# Altium PCB FPv1.3.5.PcbDoc (part 3 of 9)
Units mil, origin at the board's own origin, x right, y up, seen from the top; angles counter-clockwise.
Board outline 3200 x 2100 mil, 4 copper layers (Top Layer, GROUND PLANE, POWER PLANE, Bottom Layer); 98 components, 183 nets, 614 pads, 312 vias.
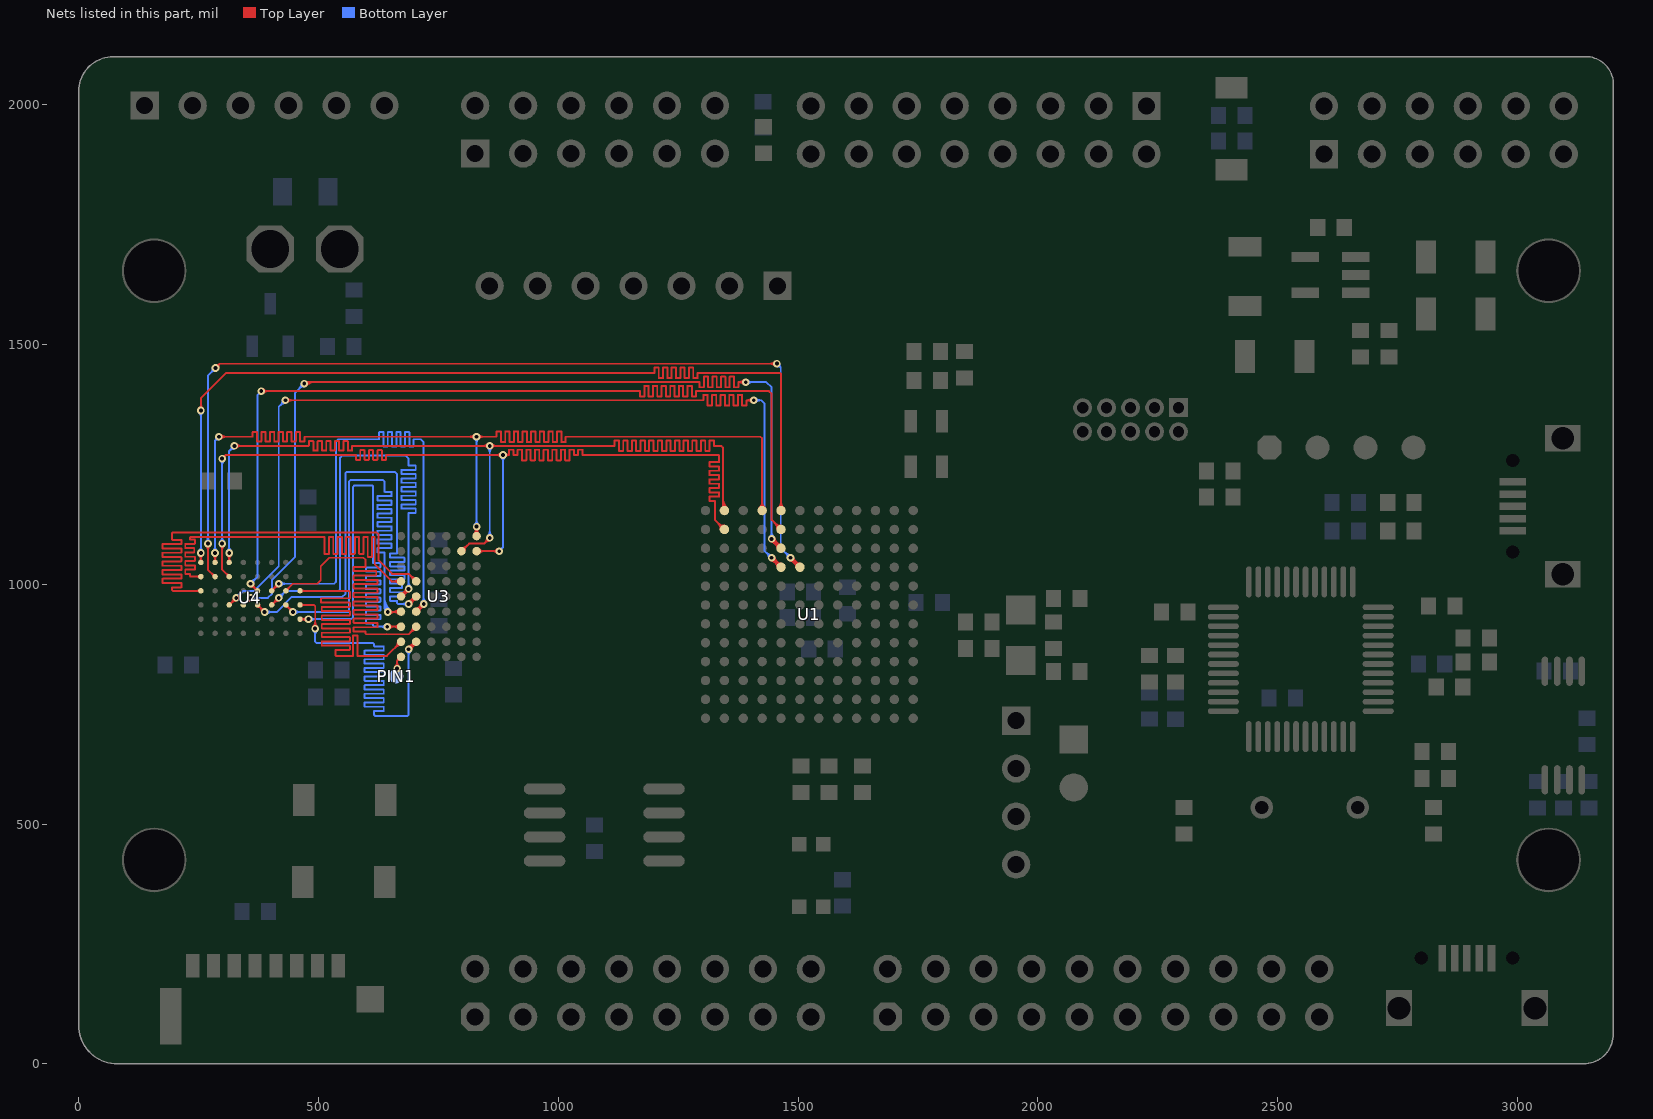
[diagram p5: the nets of this part, all layers, seen from the top]

## Via types
v1: diameter 15.87, hole 7.87, Top Layer to Bottom Layer, tented both sides, 261 vias
v2: diameter 19.8, hole 11.81, Top Layer to Bottom Layer, tented both sides, 25 vias
v3: diameter 23.62, hole 15.75, Top Layer to Bottom Layer, tented both sides, 11 vias
v4: diameter 20, hole 13, Top Layer to Bottom Layer, tented both sides, 5 vias
v5: diameter 27.68, hole 15.75, Top Layer to Bottom Layer, tented both sides, 3 vias
v6: diameter 23.74, hole 15.75, Top Layer to Bottom Layer, tented both sides, 2 vias
v7: diameter 19.8, hole 9.84, Top Layer to Bottom Layer, tented both sides, 2 vias
v8: diameter 23.62, hole 9.45, Top Layer to Bottom Layer, tented both sides, 1 vias
v9: diameter 17.24, hole 9.06, Top Layer to Bottom Layer, tented both sides, 1 vias
v10: diameter 23.74, hole 11.81, Top Layer to Bottom Layer, tented both sides, 1 vias

## Nets (pads, with @x,y where several pads share a name; then routed paths per layer and width w, separated by ;. In a path a pad name is that pad's centre, name@x,y a point inside that pad or via, vN(x,y) a via of type N, cw(c..) or ccw(c..) an arc to the next point about the centre after c; other vN are vias at no path point) (continued)
AD13: U1.B11 U3.B6 U4.F2 | length 2593.2
  Top Layer w4: v1@295.02,1080.45 cw(c284.89,1070.32) 299.21,1070.32 cw(c313.54,1070.32) v1@303.41,1080.45 ; v1(299.21,1084.65) 299.21,1030.51 U4.F2@313.98,1015.75 ; v1(299.21,1261.81) 306.76,1269.36 ; v1@300.57,1267.59 ccw(c302.08,1274.04) 306.76,1269.36 ; v1@304.99,1263.17 cw(c311.44,1264.67) 306.76,1269.36 ; U4.F2@310.27,1015.75 ccw(c301.31,1015.75) 307.65,1022.08 ccw(c313.98,1028.41) U4.F2@313.98,1019.46 ; U3.B6@829.72,1068.9 v1(876.97,1068.9) ; U3.B6@834.57,1064.05 cw(c846.28,1052.34) 846.28,1068.9 cw(c846.28,1085.45) U3.B6@834.57,1073.75 ; v1@872.77,1064.7 ccw(c862.64,1054.56) 862.64,1068.9 ccw(c862.64,1083.23) v1@872.77,1073.1 ; v1@880.64,1265.16 ccw(c870.51,1255.02) 870.51,1269.36 ccw(c870.51,1283.69) v1@880.64,1273.55 ; v1@889.41,1265.56 cw(c897.5,1258.83) 897.5,1269.36 ; v1@889.41,1273.15 ccw(c897.5,1279.88) 897.5,1269.36 ; U1.B11@1338.61,1114.17 ccw(c1319.68,1114.17) 1333.07,1127.56 ccw(c1346.46,1140.95) U1.B11@1346.46,1122.02 ; U1.B11@1346.46,1114.17 1327,1133.63 1327,1173.5 1315.53,1173.5 cw(c1315.53,1173.95) 1315.08,1173.95 1315.08,1182.05 cw(c1315.53,1182.05) 1315.53,1182.5 1334.9,1182.5 ccw(c1334.9,1182.95) 1335.35,1182.95 1335.35,1191.05 ccw(c1334.9,1191.05) 1334.9,1191.5 1315.53,1191.5 cw(c1315.53,1191.95) 1315.08,1191.95 1315.08,1200.05 cw(c1315.53,1200.05) 1315.53,1200.5 1334.9,1200.5 ccw(c1334.9,1200.95) 1335.35,1200.95 1335.35,1209.05 ccw(c1334.9,1209.05) 1334.9,1209.5 1315.53,1209.5 cw(c1315.53,1209.95) 1315.08,1209.95 1315.08,1218.05 cw(c1315.53,1218.05) 1315.53,1218.5 1334.9,1218.5 ccw(c1334.9,1218.95) 1335.35,1218.95 1335.35,1227.05 ccw(c1334.9,1227.05) 1334.9,1227.5 1315.53,1227.5 cw(c1315.53,1227.95) 1315.08,1227.95 1315.08,1236.05 cw(c1315.53,1236.05) 1315.53,1236.5 1334.9,1236.5 ccw(c1334.9,1236.95) 1335.35,1236.95 1335.35,1245.05 ccw(c1334.9,1245.05) 1334.9,1245.5 1315.53,1245.5 cw(c1315.53,1245.95) 1315.08,1245.95 1315.08,1254.05 cw(c1315.53,1254.05) 1315.53,1254.5 1334.9,1254.5 ; 306.76,1269.36 577.27,1269.36 cw(c577.27,1268.46) 578.17,1268.46 578.17,1260.26 ccw(c579.07,1260.26) 579.07,1259.36 586.27,1259.36 ccw(c586.27,1260.26) 587.17,1260.26 587.17,1278.46 cw(c588.07,1278.46) 588.07,1279.36 595.27,1279.36 cw(c595.27,1278.46) 596.17,1278.46 596.17,1260.26 ccw(c597.07,1260.26) 597.07,1259.36 604.27,1259.36 ccw(c604.27,1260.26) 605.17,1260.26 605.17,1278.46 cw(c606.07,1278.46) 606.07,1279.36 613.27,1279.36 cw(c613.27,1278.46) 614.17,1278.46 614.17,1260.26 ccw(c615.07,1260.26) 615.07,1259.36 622.27,1259.36 ccw(c622.27,1260.26) 623.17,1260.26 623.17,1278.46 cw(c624.07,1278.46) 624.07,1279.36 631.27,1279.36 cw(c631.27,1278.46) 632.17,1278.46 632.17,1260.26 ccw(c633.07,1260.26) 633.07,1259.36 640.27,1259.36 ccw(c640.27,1260.26) 641.17,1260.26 641.17,1268.46 cw(c642.07,1268.46) 642.07,1269.36 v1(884.84,1269.36) 897.5,1269.36 ; 897.5,1269.36 897.5,1279.94 cw(c897.95,1279.94) 897.95,1280.39 906.05,1280.39 cw(c906.05,1279.94) 906.5,1279.94 906.5,1269.36 915.5,1269.36 915.5,1279.94 cw(c915.95,1279.94) 915.95,1280.39 924.05,1280.39 cw(c924.05,1279.94) 924.5,1279.94 924.5,1258.78 ccw(c924.95,1258.78) 924.95,1258.33 933.05,1258.33 ccw(c933.05,1258.78) 933.5,1258.78 933.5,1279.94 cw(c933.95,1279.94) 933.95,1280.39 942.05,1280.39 cw(c942.05,1279.94) 942.5,1279.94 942.5,1258.78 ccw(c942.95,1258.78) 942.95,1258.33 951.05,1258.33 ccw(c951.05,1258.78) 951.5,1258.78 951.5,1279.94 cw(c951.95,1279.94) 951.95,1280.39 960.05,1280.39 cw(c960.05,1279.94) 960.5,1279.94 960.5,1258.78 ccw(c960.95,1258.78) 960.95,1258.33 969.05,1258.33 ccw(c969.05,1258.78) 969.5,1258.78 969.5,1279.94 cw(c969.95,1279.94) 969.95,1280.39 978.05,1280.39 cw(c978.05,1279.94) 978.5,1279.94 978.5,1258.78 ccw(c978.95,1258.78) 978.95,1258.33 987.05,1258.33 ccw(c987.05,1258.78) 987.5,1258.78 987.5,1279.94 cw(c987.95,1279.94) 987.95,1280.39 996.05,1280.39 cw(c996.05,1279.94) 996.5,1279.94 996.5,1258.78 ccw(c996.95,1258.78) 996.95,1258.33 1005.05,1258.33 ccw(c1005.05,1258.78) 1005.5,1258.78 1005.5,1279.94 cw(c1005.95,1279.94) 1005.95,1280.39 1014.05,1280.39 cw(c1014.05,1279.94) 1014.5,1279.94 1014.5,1258.78 ccw(c1014.95,1258.78) 1014.95,1258.33 1023.05,1258.33 ccw(c1023.05,1258.78) 1023.5,1258.78 1023.5,1279.94 cw(c1023.95,1279.94) 1023.95,1280.39 1032.05,1280.39 cw(c1032.05,1279.94) 1032.5,1279.94 1032.5,1269.36 1041.5,1269.36 1041.5,1279.94 cw(c1041.95,1279.94) 1041.95,1280.39 1050.05,1280.39 cw(c1050.05,1279.94) 1050.5,1279.94 1050.5,1269.36 1334.64,1269.36 1335.35,1268.65 1335.35,1254.95 ; 1334.9,1254.5 ccw(c1334.9,1254.95) 1335.35,1254.95 ; 1334.9,1254.5 1335.35,1254.95
  Bottom Layer w4: v1@295.02,1088.84 ccw(c284.89,1098.97) 299.21,1098.97 ccw(c313.54,1098.97) v1@303.41,1088.84 ; v1@295.01,1257.61 cw(c284.88,1247.48) 299.21,1247.48 cw(c313.55,1247.48) v1@303.41,1257.61 ; v1@299.21,1083.66 v1(299.21,1261.81) ; v1(876.97,1068.9) 884.84,1076.77 v1(884.84,1269.36) ; v1@880.64,1265.16 cw(c870.51,1255.02) 884.84,1255.02 cw(c899.18,1255.02) v1@889.04,1265.16
AD14: U1.B12 U3.B5 U4.F1 | length 2651.2
  Top Layer w4: v1@309.78,1060.77 cw(c299.64,1050.63) 313.98,1050.63 cw(c328.31,1050.63) v1@318.17,1060.77 ; U4.F1@311.35,1047.9 ccw(c305.02,1054.23) 313.98,1054.23 ccw(c322.93,1054.23) U4.F1@316.6,1047.9 ; U4.F1@313.98,1045.28 v1@313.98,1066.93 ; v1(324.8,1288.39) 479.33,1288.39 480.3,1289.36 480.3,1297.49 cw(c481.2,1297.49) 481.2,1298.39 488.4,1298.39 cw(c488.4,1297.49) 489.3,1297.49 489.3,1279.29 ccw(c490.2,1279.29) 490.2,1278.39 497.4,1278.39 ccw(c497.4,1279.29) 498.3,1279.29 498.3,1297.49 cw(c499.2,1297.49) 499.2,1298.39 506.4,1298.39 cw(c506.4,1297.49) 507.3,1297.49 507.3,1279.29 ccw(c508.2,1279.29) 508.2,1278.39 515.4,1278.39 ccw(c515.4,1279.29) 516.3,1279.29 516.3,1297.49 cw(c517.2,1297.49) 517.2,1298.39 524.4,1298.39 cw(c524.4,1297.49) 525.3,1297.49 525.3,1279.29 ccw(c526.2,1279.29) 526.2,1278.39 533.4,1278.39 ccw(c533.4,1279.29) 534.3,1279.29 534.3,1297.49 cw(c535.2,1297.49) 535.2,1298.39 542.4,1298.39 cw(c542.4,1297.49) 543.3,1297.49 543.3,1279.29 ccw(c544.2,1279.29) 544.2,1278.39 551.4,1278.39 ccw(c551.4,1279.29) 552.3,1279.29 552.3,1297.49 cw(c553.2,1297.49) 553.2,1298.39 560.4,1298.39 cw(c560.4,1297.49) 561.3,1297.49 561.3,1279.29 ccw(c562.2,1279.29) 562.2,1278.39 569.4,1278.39 ccw(c569.4,1279.29) 570.3,1279.29 570.3,1287.49 cw(c571.2,1287.49) 571.2,1288.39 v1(857.28,1288.39) 1117.5,1288.39 1117.5,1299.42 1126.5,1299.42 1126.5,1277.35 1135.5,1277.35 1135.5,1299.42 1144.5,1299.42 1144.5,1277.35 1153.5,1277.35 1153.5,1299.42 1162.5,1299.42 1162.5,1277.35 1171.5,1277.35 1171.5,1299.42 1180.5,1299.42 1180.5,1277.35 1189.5,1277.35 1189.5,1299.42 1198.5,1299.42 1198.5,1277.35 1207.5,1277.35 1207.5,1299.42 1216.5,1299.42 1216.5,1277.35 1225.5,1277.35 1225.5,1299.42 1234.5,1299.42 1234.5,1277.35 1243.5,1277.35 1243.5,1299.42 1252.5,1299.42 1252.5,1277.35 1261.5,1277.35 1261.5,1299.42 1270.5,1299.42 1270.5,1277.35 1279.5,1277.35 1279.5,1299.42 1288.5,1299.42 1288.5,1277.35 1297.5,1277.35 1297.5,1299.42 1306.5,1299.42 1306.5,1277.35 1315.5,1277.35 1315.5,1299.42 1324.5,1299.42 1324.5,1288.39 1339.61,1288.39 1343.35,1284.65 1343.35,1156.65 U1.B12@1346.46,1153.54 ; v1@329,1284.19 cw(c339.14,1274.05) 339.14,1288.39 cw(c339.14,1302.72) v1@329,1292.58 ; U3.B5@798.23,1068.9 813.98,1084.65 845.47,1084.65 v1(857.28,1096.46) ; U3.B5@798.23,1075.76 ccw(c798.23,1092.31) 809.94,1080.61 ccw(c821.64,1068.9) U3.B5@805.09,1068.9 ; v1@851.35,1096.46 cw(c837.03,1096.46) 847.16,1086.33 cw(c857.28,1076.2) v1@857.28,1090.52 ; v1@853.09,1284.19 ccw(c842.95,1274.05) 842.95,1288.39 ccw(c842.95,1302.72) v1@853.09,1292.58 ; v1@861.48,1284.19 cw(c871.62,1274.05) 871.62,1288.39 cw(c871.62,1302.72) v1@861.48,1292.58 ; U1.B12@1340.91,1159.09 ccw(c1335.02,1164.98) 1343.35,1164.98 ; 1343.35,1170.32 ccw(c1363.23,1170.32) U1.B12@1349.17,1156.26 ; 1343.35,1179.98 ccw(c1372.89,1179.98) U1.B12@1352,1159.09
  Bottom Layer w4: v1@309.78,1069.16 ccw(c299.64,1079.3) 313.98,1079.3 ccw(c328.31,1079.3) v1@318.17,1069.16 ; v1(313.98,1064.96) 313.98,1277.56 v1(324.8,1288.39) ; v1@318.87,1288.39 cw(c304.53,1288.39) 314.67,1278.25 cw(c324.8,1268.12) v1@324.8,1282.45 ; v1@853.09,1100.65 ccw(c842.96,1110.78) 857.28,1110.78 ccw(c871.61,1110.78) v1@861.48,1100.65 ; v1@853.09,1284.19 cw(c842.95,1274.05) 857.28,1274.05 cw(c871.62,1274.05) v1@861.48,1284.19 ; v1(857.28,1096.46) v1(857.28,1288.39)
AD15: U1.D12 U3.A6 U4.G1 | length 2623.5
  Top Layer w4: v1@280.25,1060.77 cw(c270.13,1050.64) 284.45,1050.64 cw(c298.77,1050.64) v1@288.64,1060.77 ; U4.G1@281.83,1047.9 ccw(c275.5,1054.23) 284.45,1054.23 ccw(c293.4,1054.23) U4.G1@287.07,1047.9 ; U4.G1@284.45,1045.28 v1(284.45,1064.96) ; v1(292.49,1307.41) 361.99,1307.41 ccw(c361.99,1308.31) 362.89,1308.31 362.89,1316.51 cw(c363.79,1316.51) 363.79,1317.41 370.99,1317.41 cw(c370.99,1316.51) 371.89,1316.51 371.89,1298.31 ccw(c372.79,1298.31) 372.79,1297.41 379.99,1297.41 ccw(c379.99,1298.31) 380.89,1298.31 380.89,1316.51 cw(c381.79,1316.51) 381.79,1317.41 388.99,1317.41 cw(c388.99,1316.51) 389.89,1316.51 389.89,1298.31 ccw(c390.79,1298.31) 390.79,1297.41 397.99,1297.41 ccw(c397.99,1298.31) 398.89,1298.31 398.89,1316.51 cw(c399.79,1316.51) 399.79,1317.41 406.99,1317.41 cw(c406.99,1316.51) 407.89,1316.51 407.89,1298.31 ccw(c408.79,1298.31) 408.79,1297.41 415.99,1297.41 ccw(c415.99,1298.31) 416.89,1298.31 416.89,1316.51 cw(c417.79,1316.51) 417.79,1317.41 424.99,1317.41 cw(c424.99,1316.51) 425.89,1316.51 425.89,1298.31 ccw(c426.79,1298.31) 426.79,1297.41 433.99,1297.41 ccw(c433.99,1298.31) 434.89,1298.31 434.89,1316.51 cw(c435.79,1316.51) 435.79,1317.41 442.99,1317.41 cw(c442.99,1316.51) 443.89,1316.51 443.89,1298.31 ccw(c444.79,1298.31) 444.79,1297.41 451.99,1297.41 ccw(c451.99,1298.31) 452.89,1298.31 452.89,1316.51 cw(c453.79,1316.51) 453.79,1317.41 460.99,1317.41 cw(c460.99,1316.51) 461.89,1316.51 461.89,1298.31 ccw(c462.79,1298.31) 462.79,1297.41 469.99,1297.41 ccw(c469.99,1298.31) 470.89,1298.31 470.89,1306.51 cw(c471.79,1306.51) 471.79,1307.41 v1(829.55,1307.41) 871.5,1307.41 871.5,1317.99 cw(c871.95,1317.99) 871.95,1318.44 880.05,1318.44 cw(c880.05,1317.99) 880.5,1317.99 880.5,1296.83 ccw(c880.95,1296.83) 880.95,1296.38 889.05,1296.38 ccw(c889.05,1296.83) 889.5,1296.83 889.5,1317.99 cw(c889.95,1317.99) 889.95,1318.44 898.05,1318.44 cw(c898.05,1317.99) 898.5,1317.99 898.5,1296.83 ccw(c898.95,1296.83) 898.95,1296.38 907.05,1296.38 ccw(c907.05,1296.83) 907.5,1296.83 907.5,1317.99 cw(c907.95,1317.99) 907.95,1318.44 916.05,1318.44 cw(c916.05,1317.99) 916.5,1317.99 916.5,1296.83 ccw(c916.95,1296.83) 916.95,1296.38 925.05,1296.38 ccw(c925.05,1296.83) 925.5,1296.83 925.5,1317.99 cw(c925.95,1317.99) 925.95,1318.44 934.05,1318.44 cw(c934.05,1317.99) 934.5,1317.99 934.5,1296.83 ccw(c934.95,1296.83) 934.95,1296.38 943.05,1296.38 ccw(c943.05,1296.83) 943.5,1296.83 943.5,1317.99 cw(c943.95,1317.99) 943.95,1318.44 952.05,1318.44 cw(c952.05,1317.99) 952.5,1317.99 952.5,1296.83 ccw(c952.95,1296.83) 952.95,1296.38 961.05,1296.38 ccw(c961.05,1296.83) 961.5,1296.83 961.5,1317.99 cw(c961.95,1317.99) 961.95,1318.44 970.05,1318.44 cw(c970.05,1317.99) 970.5,1317.99 970.5,1296.83 ccw(c970.95,1296.83) 970.95,1296.38 979.05,1296.38 ccw(c979.05,1296.83) 979.5,1296.83 979.5,1317.99 cw(c979.95,1317.99) 979.95,1318.44 988.05,1318.44 cw(c988.05,1317.99) 988.5,1317.99 988.5,1296.83 ccw(c988.95,1296.83) 988.95,1296.38 997.05,1296.38 ccw(c997.05,1296.83) 997.5,1296.83 997.5,1317.99 cw(c997.95,1317.99) 997.95,1318.44 1006.05,1318.44 cw(c1006.05,1317.99) 1006.5,1317.99 1006.5,1296.83 ccw(c1006.95,1296.83) 1006.95,1296.38 1015.05,1296.38 ccw(c1015.05,1296.83) 1015.5,1296.83 1015.5,1307.41 1421.59,1307.41 1425.2,1303.8 U1.D12@1425.2,1153.54 ; v1@296.69,1303.22 cw(c306.83,1293.08) 306.83,1307.41 cw(c306.83,1321.75) v1@296.69,1311.61 ; U3.A6@824.87,1105.24 ccw(c813.17,1116.95) 829.72,1116.95 ccw(c846.28,1116.95) U3.A6@834.57,1105.24 ; v1@825.36,1303.22 ccw(c815.22,1293.08) 815.22,1307.41 ccw(c815.22,1321.75) v1@825.36,1311.61 ; v1@825.53,1115.88 cw(c815.39,1105.75) 829.72,1105.75 cw(c844.06,1105.75) v1@833.92,1115.88 ; v1@826.07,1115.4 cw(c822.91,1111.35) 827.87,1110.03 cw(c834.39,1108.28) v1@831.91,1114.56 ; v1@827.54,1114.56 cw(c825.06,1108.28) 831.58,1110.03 cw(c836.54,1111.35) v1@833.38,1115.4 ; U3.A6@829.72,1100.39 v1(829.72,1120.08) ; v1@833.75,1303.22 cw(c843.89,1293.08) 843.89,1307.41 cw(c843.89,1321.75) v1@833.75,1311.61 ; U1.D12@1419.65,1159.09 ccw(c1406.26,1172.48) 1425.2,1172.48 ccw(c1444.13,1172.48) U1.D12@1430.74,1159.09
  Bottom Layer w4: v1@280.25,1069.16 ccw(c270.13,1079.28) 284.45,1079.28 ccw(c298.77,1079.28) v1@288.64,1069.16 ; v1(284.45,1064.96) 284.45,1299.37 ; v1@286.65,1306.37 cw(c278.84,1304.98) 284.45,1299.37 ; v1@291.45,1301.57 ccw(c290.05,1293.77) 284.45,1299.37 ; v1(292.49,1307.41) 284.45,1299.37 ; v1@825.36,1303.22 cw(c814.81,1292.67) 829.72,1292.67 ; v1@825.53,1124.28 ccw(c815.39,1134.41) 829.72,1134.41 ccw(c844.06,1134.41) v1@833.92,1124.28 ; v1(829.55,1307.41) 829.72,1307.24 v1(829.72,1120.08) ; 829.72,1293.49 cw(c843.48,1293.49) v1@833.75,1303.22
AD16: U1.E9 U4.F4 | length 2372.6
  Top Layer w4: U4.F4@313.98,956.69 v1(328.74,971.46) ; U4.F4@313.98,960.4 ccw(c313.98,969.35) 320.3,963.02 ; U4.F4@317.68,956.69 cw(c326.65,956.69) 320.31,963.03 ; v1@322.8,971.46 cw(c308.47,971.46) 318.6,961.32 cw(c328.74,951.19) v1@328.74,965.52 ; v1(431.1,1383.53) 1302.5,1383.53 1302.5,1394.11 cw(c1302.95,1394.11) 1302.95,1394.56 1311.05,1394.56 cw(c1311.05,1394.11) 1311.5,1394.11 1311.5,1372.95 ccw(c1311.95,1372.95) 1311.95,1372.5 1320.05,1372.5 ccw(c1320.05,1372.95) 1320.5,1372.95 1320.5,1394.11 cw(c1320.95,1394.11) 1320.95,1394.56 1329.05,1394.56 cw(c1329.05,1394.11) 1329.5,1394.11 1329.5,1372.95 ccw(c1329.95,1372.95) 1329.95,1372.5 1338.05,1372.5 ccw(c1338.05,1372.95) 1338.5,1372.95 1338.5,1394.11 cw(c1338.95,1394.11) 1338.95,1394.56 1347.05,1394.56 cw(c1347.05,1394.11) 1347.5,1394.11 1347.5,1372.95 ccw(c1347.95,1372.95) 1347.95,1372.5 1356.05,1372.5 ccw(c1356.05,1372.95) 1356.5,1372.95 1356.5,1394.11 cw(c1356.95,1394.11) 1356.95,1394.56 1365.05,1394.56 cw(c1365.05,1394.11) 1365.5,1394.11 1365.5,1372.95 ccw(c1365.95,1372.95) 1365.95,1372.5 1374.05,1372.5 ccw(c1374.05,1372.95) 1374.5,1372.95 1374.5,1394.11 cw(c1374.95,1394.11) 1374.95,1394.56 1383.05,1394.56 cw(c1383.05,1394.11) 1383.5,1394.11 1383.5,1372.95 ccw(c1383.95,1372.95) 1383.95,1372.5 1392.05,1372.5 ccw(c1392.05,1372.95) 1392.5,1372.95 1392.5,1383.53 v1(1407.48,1383.53) ; v1@435.3,1379.33 cw(c445.43,1369.21) 445.43,1383.53 cw(c445.43,1397.85) v1@435.3,1387.72 ; v1@1403.29,1379.33 ccw(c1393.16,1369.21) 1393.16,1383.53 ccw(c1393.16,1397.85) v1@1403.29,1387.72 ; v1@1443.38,1049.38 cw(c1437.85,1028.27) U1.E9@1456.74,1039.18 ; v1@1444.39,1053.25 cw(c1441.26,1041.31) 1451.95,1047.48 ; v1@1444.88,1049.19 cw(c1444.88,1034.86) 1455.01,1044.99 cw(c1465.14,1055.12) v1@1450.81,1055.12 ; v1(1444.88,1055.12) U1.E9@1464.57,1035.43 ; v1@1446.75,1055.61 ccw(c1458.69,1058.74) 1452.52,1048.05 ; v1@1446.85,1049.52 cw(c1448.23,1045.58) 1451.84,1047.67 ; v1@1450.48,1053.15 ccw(c1454.42,1051.77) 1452.33,1048.16 ; v1@1450.62,1056.62 ccw(c1471.73,1062.15) U1.E9@1460.82,1043.26 ; U1.E9@1456.72,1035.43 ccw(c1437.79,1035.43) 1451.18,1048.82 ccw(c1464.57,1062.21) U1.E9@1464.57,1043.28 ; v1@1446.42,1049.39 cw(c1448.09,1043.15) 1451.32,1048.74 ccw(c1448.09,1043.15) v1@1446.42,1049.39 ; v1@1450.61,1053.58 ccw(c1456.85,1051.91) 1451.26,1048.68 cw(c1456.85,1051.91) v1@1450.61,1053.58
  Bottom Layer w4: v1(328.74,971.46) 343.5,986.22 366.14,986.22 417.32,1037.4 417.32,1369.75 v1(431.1,1383.53) ; v1@328.74,977.39 ccw(c328.74,991.73) 338.87,981.59 ccw(c349.01,971.46) v1@334.67,971.46 ; v1@425.17,1383.53 cw(c410.85,1383.53) 420.97,1373.4 cw(c431.1,1363.27) v1@431.1,1377.6 ; v1(1407.48,1383.53) 1423.47,1383.53 1430,1377 1430,1070 v1(1444.88,1055.12) ; v1@1411.68,1379.33 cw(c1421.8,1369.21) 1421.8,1383.53 cw(c1421.8,1397.85) v1@1411.68,1387.72 ; v1@1438.95,1055.12 ccw(c1424.63,1055.12) 1434.75,1065.25 ccw(c1444.88,1075.37) v1@1444.88,1061.05
AD17: U1.E10 U4.E4 | length 2374.4
  Top Layer w4: U4.E4@343.5,956.69 v1(358.27,971.46) ; U4.E4@343.5,960.4 ccw(c343.5,969.35) 349.83,963.02 ccw(c356.17,956.69) U4.E4@347.21,956.69 ; v1@352.33,971.46 cw(c338,971.46) 348.13,961.32 cw(c358.27,951.19) v1@358.27,965.52 ; v1(470.47,1418.31) 473.75,1421.59 1294.5,1421.59 1294.5,1411.01 ccw(c1294.95,1411.01) 1294.95,1410.56 1303.05,1410.56 ccw(c1303.05,1411.01) 1303.5,1411.01 1303.5,1432.17 cw(c1303.95,1432.17) 1303.95,1432.62 1312.05,1432.62 cw(c1312.05,1432.17) 1312.5,1432.17 1312.5,1411.01 ccw(c1312.95,1411.01) 1312.95,1410.56 1321.05,1410.56 ccw(c1321.05,1411.01) 1321.5,1411.01 1321.5,1432.17 cw(c1321.95,1432.17) 1321.95,1432.62 1330.05,1432.62 cw(c1330.05,1432.17) 1330.5,1432.17 1330.5,1411.01 ccw(c1330.95,1411.01) 1330.95,1410.56 1339.05,1410.56 ccw(c1339.05,1411.01) 1339.5,1411.01 1339.5,1432.17 cw(c1339.95,1432.17) 1339.95,1432.62 1348.05,1432.62 cw(c1348.05,1432.17) 1348.5,1432.17 1348.5,1411.01 ccw(c1348.95,1411.01) 1348.95,1410.56 1357.05,1410.56 ccw(c1357.05,1411.01) 1357.5,1411.01 1357.5,1432.17 cw(c1357.95,1432.17) 1357.95,1432.62 1366.05,1432.62 cw(c1366.05,1432.17) 1366.5,1432.17 1366.5,1411.01 ccw(c1366.95,1411.01) 1366.95,1410.56 1375.05,1410.56 ccw(c1375.05,1411.01) 1375.5,1411.01 1375.5,1421.59 1390.42,1421.59 v1(1390.75,1421.26) ; v1@471.84,1416.94 cw(c483.06,1405.72) 483.06,1421.59 ; v1@474.67,1414.11 cw(c492.71,1396.07) 492.71,1421.59 ; 1375.63,1421.59 cw(c1375.63,1406.15) v1@1386.55,1417.06 ; 1377.21,1421.59 ccw(c1377.21,1434.79) v1@1386.55,1425.46 ; v1@1443.38,1088.75 cw(c1437.85,1067.64) U1.E10@1456.74,1078.55 ; v1@1444.39,1092.62 cw(c1441.26,1080.68) 1451.95,1086.85 ; v1@1444.88,1088.56 cw(c1444.88,1074.23) 1455.01,1084.36 cw(c1465.14,1094.49) v1@1450.81,1094.49 ; v1(1444.88,1094.49) U1.E10@1464.57,1074.8 ; v1@1446.75,1094.98 ccw(c1458.69,1098.11) 1452.52,1087.42 ; v1@1446.85,1088.89 cw(c1448.23,1084.95) 1451.84,1087.04 ; v1@1450.48,1092.52 ccw(c1454.42,1091.14) 1452.33,1087.53 ; v1@1450.62,1095.99 ccw(c1471.73,1101.52) U1.E10@1460.82,1082.63 ; U1.E10@1456.72,1074.8 ccw(c1437.79,1074.8) 1451.18,1088.19 ccw(c1464.57,1101.58) U1.E10@1464.57,1082.65 ; v1@1446.42,1088.76 cw(c1448.09,1082.52) 1451.32,1088.11 ccw(c1448.09,1082.52) v1@1446.42,1088.76 ; v1@1450.61,1092.95 ccw(c1456.85,1091.28) 1451.26,1088.06 cw(c1456.85,1091.28) v1@1450.61,1092.95
  Bottom Layer w4: v1(358.27,971.46) 394.69,971.46 403.54,980.31 403.54,995.05 403.39,995.21 403.39,1009.2 450.79,1056.6 450.79,1398.62 v1(470.47,1418.31) ; v1@362.47,967.26 cw(c372.6,957.12) 372.6,971.46 cw(c372.6,985.79) v1@362.47,975.65 ; v1@464.54,1418.31 cw(c450.22,1418.31) 460.34,1408.18 cw(c470.47,1398.05) v1@470.47,1412.37 ; v1(1390.75,1421.26) 1433.74,1421.26 1444.88,1410.12 v1(1444.88,1094.49) ; v1@1394.94,1417.06 cw(c1405.07,1406.94) 1405.07,1421.26 cw(c1405.07,1435.58) v1@1394.94,1425.46 ; v1@1440.69,1098.68 ccw(c1430.56,1108.81) 1444.88,1108.81 ccw(c1459.21,1108.81) v1@1449.08,1098.68
AD18: U1.E11 U4.D3 | length 2182.3
  Top Layer w4: v1@358.27,995.05 cw(c358.27,980.71) 368.4,990.85 cw(c378.54,1000.98) v1@364.2,1000.98 ; v1(358.27,1000.98) U4.D3@373.03,986.22 ; U4.D3@369.32,986.22 ccw(c360.37,986.22) 366.7,992.55 ccw(c373.03,998.88) U4.D3@373.03,989.93 ; v1(380.91,1402.56) 1170.5,1402.56 1170.5,1391.98 ccw(c1170.95,1391.98) 1170.95,1391.53 1179.05,1391.53 ccw(c1179.05,1391.98) 1179.5,1391.98 1179.5,1413.14 cw(c1179.95,1413.14) 1179.95,1413.59 1188.05,1413.59 cw(c1188.05,1413.14) 1188.5,1413.14 1188.5,1391.98 ccw(c1188.95,1391.98) 1188.95,1391.53 1197.05,1391.53 ccw(c1197.05,1391.98) 1197.5,1391.98 1197.5,1413.14 cw(c1197.95,1413.14) 1197.95,1413.59 1206.05,1413.59 cw(c1206.05,1413.14) 1206.5,1413.14 1206.5,1391.98 ccw(c1206.95,1391.98) 1206.95,1391.53 1215.05,1391.53 ccw(c1215.05,1391.98) 1215.5,1391.98 1215.5,1413.14 cw(c1215.95,1413.14) 1215.95,1413.59 1224.05,1413.59 cw(c1224.05,1413.14) 1224.5,1413.14 1224.5,1391.98 ccw(c1224.95,1391.98) 1224.95,1391.53 1233.05,1391.53 ccw(c1233.05,1391.98) 1233.5,1391.98 1233.5,1413.14 cw(c1233.95,1413.14) 1233.95,1413.59 1242.05,1413.59 cw(c1242.05,1413.14) 1242.5,1413.14 1242.5,1391.98 ccw(c1242.95,1391.98) 1242.95,1391.53 1251.05,1391.53 ccw(c1251.05,1391.98) 1251.5,1391.98 1251.5,1413.14 cw(c1251.95,1413.14) 1251.95,1413.59 1260.05,1413.59 cw(c1260.05,1413.14) 1260.5,1413.14 1260.5,1391.98 ccw(c1260.95,1391.98) 1260.95,1391.53 1269.05,1391.53 ccw(c1269.05,1391.98) 1269.5,1391.98 1269.5,1413.14 cw(c1269.95,1413.14) 1269.95,1413.59 1278.05,1413.59 cw(c1278.05,1413.14) 1278.5,1413.14 1278.5,1391.98 ccw(c1278.95,1391.98) 1278.95,1391.53 1287.05,1391.53 ccw(c1287.05,1391.98) 1287.5,1391.98 1287.5,1402.56 1439.44,1402.56 1444.88,1397.12 1444.88,1133.86 U1.E11@1464.57,1114.17 ; v1@385.1,1398.36 cw(c395.23,1388.23) 395.23,1402.56 cw(c395.23,1416.88) v1@385.1,1406.75 ; U1.E11@1456.72,1114.17 ccw(c1437.79,1114.17) 1451.18,1127.56 ccw(c1464.57,1140.95) U1.E11@1464.57,1122.02
  Bottom Layer w4: v1(358.27,1000.98) 373.03,1015.75 373.03,1394.68 v1(380.91,1402.56) ; v1@358.27,1006.92 ccw(c358.27,1021.25) 368.4,1011.12 ccw(c378.54,1000.98) v1@364.2,1000.98
AD19: U1.E12 U4.H1 | length 2209.7
  Top Layer w4: v1@250.72,1060.77 cw(c240.59,1050.63) 254.92,1050.63 cw(c269.25,1050.63) v1@259.12,1060.77 ; v1@250.73,1366.4 ccw(c239.41,1377.72) 255.41,1377.72 ; U4.H1@252.3,1047.9 ccw(c245.97,1054.23) 254.92,1054.23 ccw(c263.87,1054.23) U4.H1@257.54,1047.9 ; U4.H1@254.92,1045.28 v1(254.92,1064.96) ; v1@255.41,1362.7 255.41,1388.29 307.74,1440.62 1200.5,1440.62 1200.5,1451.2 cw(c1200.95,1451.2) 1200.95,1451.65 1209.05,1451.65 cw(c1209.05,1451.2) 1209.5,1451.2 1209.5,1430.04 ccw(c1209.95,1430.04) 1209.95,1429.59 1218.05,1429.59 ccw(c1218.05,1430.04) 1218.5,1430.04 1218.5,1451.2 cw(c1218.95,1451.2) 1218.95,1451.65 1227.05,1451.65 cw(c1227.05,1451.2) 1227.5,1451.2 1227.5,1430.04 ccw(c1227.95,1430.04) 1227.95,1429.59 1236.05,1429.59 ccw(c1236.05,1430.04) 1236.5,1430.04 1236.5,1451.2 cw(c1236.95,1451.2) 1236.95,1451.65 1245.05,1451.65 cw(c1245.05,1451.2) 1245.5,1451.2 1245.5,1430.04 ccw(c1245.95,1430.04) 1245.95,1429.59 1254.05,1429.59 ccw(c1254.05,1430.04) 1254.5,1430.04 1254.5,1451.2 cw(c1254.95,1451.2) 1254.95,1451.65 1263.05,1451.65 cw(c1263.05,1451.2) 1263.5,1451.2 1263.5,1430.04 ccw(c1263.95,1430.04) 1263.95,1429.59 1272.05,1429.59 ccw(c1272.05,1430.04) 1272.5,1430.04 1272.5,1451.2 cw(c1272.95,1451.2) 1272.95,1451.65 1281.05,1451.65 cw(c1281.05,1451.2) 1281.5,1451.2 1281.5,1430.04 ccw(c1281.95,1430.04) 1281.95,1429.59 1290.05,1429.59 ccw(c1290.05,1430.04) 1290.5,1430.04 1290.5,1440.62 1462.38,1440.62 1464.57,1438.43 U1.E12@1464.57,1153.54 ; 255.41,1375.34 ccw(c268.06,1375.34) v1@259.12,1366.4 ; U1.E12@1459.02,1159.09 ccw(c1445.63,1172.48) 1464.57,1172.48 ccw(c1483.5,1172.48) U1.E12@1470.11,1159.09
  Bottom Layer w4: v1@250.72,1069.16 ccw(c240.59,1079.3) 254.92,1079.3 ccw(c269.25,1079.3) v1@259.12,1069.16 ; v1@250.73,1358.01 cw(c240.6,1347.88) 254.92,1347.88 cw(c269.24,1347.88) v1@259.12,1358.01 ; v1(254.92,1064.96) v1(254.92,1362.2)
AD20: U1.F9 U4.G2 | length 2366.4
  Top Layer w4: v1@265.49,1080.45 cw(c255.36,1070.32) 269.68,1070.32 cw(c284.01,1070.32) v1@273.88,1080.45 ; v1(269.68,1084.65) 269.68,1030.51 U4.G2@284.45,1015.75 ; U4.G2@280.74,1015.75 ccw(c271.79,1015.75) 278.12,1022.08 ccw(c284.45,1028.41) U4.G2@284.45,1019.46 ; v1(285.43,1450.79) 294.29,1459.64 ; v1@286.02,1456.69 ccw(c287.04,1466.9) 294.29,1459.64 ; v1@291.34,1451.38 cw(c301.54,1452.39) 294.29,1459.64 ; 1440.82,1459.64 ccw(c1440.82,1475.18) v1@1451.8,1464.2 ; 1442.53,1459.64 cw(c1442.53,1446.53) v1@1451.8,1455.8 ; v1@1456,1459.64 294.29,1459.64 ; v1@1482.75,1049.38 cw(c1477.22,1028.27) U1.F9@1496.11,1039.18 ; v1@1483.76,1053.25 cw(c1480.63,1041.31) 1491.32,1047.48 ; v1@1484.25,1049.19 cw(c1484.25,1034.86) 1494.38,1044.99 cw(c1504.51,1055.12) v1@1490.18,1055.12 ; v1(1484.25,1055.12) U1.F9@1503.94,1035.43 ; v1@1486.12,1055.61 ccw(c1498.06,1058.74) 1491.89,1048.05 ; v1@1486.22,1049.52 cw(c1487.6,1045.58) 1491.21,1047.67 ; v1@1489.85,1053.15 ccw(c1493.79,1051.77) 1491.7,1048.16 ; v1@1489.99,1056.62 ccw(c1511.1,1062.15) U1.F9@1500.19,1043.26 ; U1.F9@1496.09,1035.43 ccw(c1477.16,1035.43) 1490.55,1048.82 ccw(c1503.94,1062.21) U1.F9@1503.94,1043.28 ; v1@1485.79,1049.39 cw(c1487.46,1043.15) 1490.69,1048.74 ccw(c1487.46,1043.15) v1@1485.79,1049.39 ; v1@1489.98,1053.58 ccw(c1496.22,1051.91) 1490.63,1048.68 cw(c1496.22,1051.91) v1@1489.98,1053.58
  Bottom Layer w4: v1@265.49,1088.84 ccw(c254.99,1099.34) 269.84,1099.34 ; v1(269.68,1084.65) 269.68,1083.66 269.84,1083.81 269.84,1359.12 269.68,1359.27 269.68,1435.04 v1(285.43,1450.79) ; 269.84,1098.6 ccw(c283.64,1098.6) v1@273.88,1088.84 ; v1@279.5,1450.79 cw(c265.18,1450.79) 275.3,1440.66 cw(c285.43,1430.53) v1@285.43,1444.85 ; v1(1456,1460) 1464,1452 ; v1@1457.07,1454.16 cw(c1458.47,1446.47) 1464,1452 ; v1@1461.84,1458.93 ccw(c1469.53,1457.53) 1464,1452 ; v1@1478.32,1055.12 ccw(c1464,1055.12) 1474.12,1065.25 ccw(c1484.25,1075.37) v1@1484.25,1061.05 ; v1(1484.25,1055.12) 1464,1075.37 1464,1452
ADDR0: PIN1.1 U3.J1 | length 64.1
  Top Layer w4: v1@659.8,828.2 ccw(c649.68,838.32) 664,838.32 ccw(c678.32,838.32) v1@668.2,828.2 ; v1(664,824) 664,840.18 ; U3.J1@665.65,846.54 cw(c659.42,844.76) 664,840.18 ; U3.J1@670.36,841.83 ccw(c668.58,835.6) 664,840.18 ; U3.J1@672.24,848.43 664,840.18
ADDR1: U3.H1 U4.A3 | length 1235.2
  Top Layer w4: U4.A3@461.61,986.22 562.99,986.22 565.43,983.79 565.43,971.65 cw(c564.53,971.65) 564.53,970.75 506.33,970.75 ccw(c506.33,969.85) 505.43,969.85 505.43,962.65 ccw(c506.33,962.65) 506.33,961.75 564.53,961.75 cw(c564.53,960.85) 565.43,960.85 565.43,953.65 cw(c564.53,953.65) 564.53,952.75 507.91,952.75 ccw(c507.91,951.85) 507.01,951.85 507.01,944.65 ccw(c507.91,944.65) 507.91,943.75 564.53,943.75 cw(c564.53,942.85) 565.43,942.85 565.43,935.65 cw(c564.53,935.65) 564.53,934.75 507.91,934.75 ccw(c507.91,933.85) 507.01,933.85 507.01,926.65 ccw(c507.91,926.65) 507.91,925.75 564.53,925.75 cw(c564.53,924.85) 565.43,924.85 565.43,917.65 cw(c564.53,917.65) 564.53,916.75 507.91,916.75 ccw(c507.91,915.85) 507.01,915.85 507.01,908.65 ccw(c507.91,908.65) 507.91,907.75 564.53,907.75 cw(c564.53,906.85) 565.43,906.85 565.43,899.65 cw(c564.53,899.65) 564.53,898.75 507.91,898.75 ccw(c507.91,897.85) 507.01,897.85 507.01,890.65 ccw(c507.91,890.65) 507.91,889.75 564.53,889.75 cw(c564.53,888.85) 565.43,888.85 565.43,881.65 cw(c564.53,881.65) 564.53,880.75 507.91,880.75 ccw(c507.91,879.85) 507.01,879.85 507.01,872.65 ccw(c507.91,872.65) 507.91,871.75 564.53,871.75 cw(c564.53,870.85) 565.43,870.85 565.43,863.65 cw(c564.53,863.65) 564.53,862.75 536.33,862.75 ccw(c536.33,861.85) 535.43,861.85 535.43,851.38 536.42,850.39 571.51,850.39 ccw(c571.51,851.29) 572.41,851.29 572.41,892.26 cw(c573.31,892.26) 573.31,893.16 580.51,893.16 cw(c580.51,892.26) 581.41,892.26 581.41,850.39 642.72,850.39 U3.H1@672.24,879.92 ; U4.A3@464.24,983.6 cw(c470.57,977.27) 470.57,986.22 cw(c470.57,995.17) U4.A3@464.24,988.84 ; U3.H1@665.39,879.92 cw(c648.83,879.92) 660.54,868.21 cw(c672.24,856.51) U3.H1@672.24,873.06
ADDR2: U3.H2 U4.A4 | length 1369.3
  Top Layer w4: U4.A4@461.61,956.69 490.16,956.69 493.31,953.54 v1@493.31,907.83 ; U4.A4@464.24,954.07 cw(c470.57,947.74) 470.57,956.69 cw(c470.57,965.65) U4.A4@464.24,959.32 ; v1@488.92,911.68 ccw(c478.31,922.28) 493.31,922.28 ; 493.31,921.33 ccw(c506.96,921.33) v1@497.31,911.68 ; v1@687.24,870.06 ccw(c685.63,882.79) U3.H2@696.74,876.37 ; v1(687.99,864.17) U3.H2@703.74,879.92 ; v1@687.99,870.11 ccw(c687.99,884.43) 698.12,874.3 ccw(c708.25,864.17) v1@693.93,864.17 ; v1@689.53,869.9 ccw(c691.93,878.86) 696.56,870.83 ; v1@693.72,865.71 cw(c702.68,868.11) 694.65,872.75 ; v1@693.88,863.43 cw(c706.61,861.81) U3.H2@700.19,872.93 ; U3.H2@696.88,879.92 cw(c680.32,879.92) 692.03,868.21 cw(c703.74,856.51) U3.H2@703.74,873.06
  Bottom Layer w4: v1@488.92,903.29 cw(c478.79,893.16) 493.11,893.16 cw(c507.43,893.16) v1@497.31,903.29 ; v1(493.11,907.48) 493.11,879.92 496.06,876.97 614.17,876.97 616.14,875 616.14,871.4 ccw(c617.04,871.4) 617.04,870.5 635.24,870.5 cw(c635.24,869.6) 636.14,869.6 636.14,862.4 cw(c635.24,862.4) 635.24,861.5 597.04,861.5 ccw(c597.04,860.6) 596.14,860.6 596.14,853.4 ccw(c597.04,853.4) 597.04,852.5 635.24,852.5 cw(c635.24,851.6) 636.14,851.6 636.14,844.4 cw(c635.24,844.4) 635.24,843.5 597.04,843.5 ccw(c597.04,842.6) 596.14,842.6 596.14,835.4 ccw(c597.04,835.4) 597.04,834.5 635.24,834.5 cw(c635.24,833.6) 636.14,833.6 636.14,826.4 cw(c635.24,826.4) 635.24,825.5 597.04,825.5 ccw(c597.04,824.6) 596.14,824.6 596.14,817.4 ccw(c597.04,817.4) 597.04,816.5 635.24,816.5 cw(c635.24,815.6) 636.14,815.6 636.14,808.4 cw(c635.24,808.4) 635.24,807.5 597.04,807.5 ccw(c597.04,806.6) 596.14,806.6 596.14,799.4 ccw(c597.04,799.4) 597.04,798.5 635.24,798.5 cw(c635.24,797.6) 636.14,797.6 636.14,790.4 cw(c635.24,790.4) 635.24,789.5 597.04,789.5 ccw(c597.04,788.6) 596.14,788.6 596.14,781.4 ccw(c597.04,781.4) 597.04,780.5 635.24,780.5 cw(c635.24,779.6) 636.14,779.6 636.14,772.4 cw(c635.24,772.4) 635.24,771.5 597.04,771.5 ccw(c597.04,770.6) 596.14,770.6 596.14,763.4 ccw(c597.04,763.4) 597.04,762.5 635.24,762.5 cw(c635.24,761.6) 636.14,761.6 636.14,754.4 cw(c635.24,754.4) 635.24,753.5 597.04,753.5 ccw(c597.04,752.6) 596.14,752.6 596.14,745.4 ccw(c597.04,745.4) 597.04,744.5 635.24,744.5 cw(c635.24,743.6) 636.14,743.6 636.14,736.4 cw(c635.24,736.4) 635.24,735.5 616.14,735.5 616.14,727.36 618.11,725.39 686.02,725.39 687.99,727.36 v1(687.99,864.17) ; 616.14,734.6 cw(c617.04,734.6) 617.04,735.5 ; v1@683.8,859.98 cw(c673.67,849.85) 687.99,849.85 cw(c702.32,849.85) v1@692.19,859.98
ADDR3: U3.G1 U4.A5 | length 1316
  Top Layer w4: U4.A5@461.61,927.17 v1(479.33,927.17) ; U4.A5@464.24,924.54 cw(c470.57,918.21) 470.57,927.17 cw(c470.57,936.12) U4.A5@464.24,929.79 ; v1@475.13,922.97 ccw(c465,912.83) 465,927.17 ccw(c465,941.5) v1@475.13,931.36 ; v1(643.7,911.42) U3.G1@672.24,911.42 ; v1@647.9,907.22 cw(c658.03,897.08) 658.03,911.42 cw(c658.03,925.75) v1@647.9,915.62 ; U3.G1@667.39,906.57 ccw(c655.69,894.86) 655.69,911.42 ccw(c655.69,927.97) U3.G1@667.39,916.27
  Bottom Layer w4: v1(479.33,927.17) 567.91,927.17 572.1,931.35 572.1,1203.1 575,1206 612,1206 614.14,1203.86 614.14,1044.82 ccw(c615.04,1044.82) 615.04,1043.92 628.24,1043.92 cw(c628.24,1043.02) 629.14,1043.02 629.14,1035.82 cw(c628.24,1035.82) 628.24,1034.92 600.04,1034.92 ccw(c600.04,1034.02) 599.14,1034.02 599.14,1026.82 ccw(c600.04,1026.82) 600.04,1025.92 628.24,1025.92 cw(c628.24,1025.02) 629.14,1025.02 629.14,1017.82 cw(c628.24,1017.82) 628.24,1016.92 600.04,1016.92 ccw(c600.04,1016.02) 599.14,1016.02 599.14,1008.82 ccw(c600.04,1008.82) 600.04,1007.92 628.24,1007.92 cw(c628.24,1007.02) 629.14,1007.02 629.14,999.82 cw(c628.24,999.82) 628.24,998.92 600.04,998.92 ccw(c600.04,998.02) 599.14,998.02 599.14,990.82 ccw(c600.04,990.82) 600.04,989.92 628.24,989.92 cw(c628.24,989.02) 629.14,989.02 629.14,981.82 cw(c628.24,981.82) 628.24,980.92 600.04,980.92 ccw(c600.04,980.02) 599.14,980.02 599.14,972.82 ccw(c600.04,972.82) 600.04,971.92 628.24,971.92 cw(c628.24,971.02) 629.14,971.02 629.14,963.82 cw(c628.24,963.82) 628.24,962.92 600.04,962.92 ccw(c600.04,962.02) 599.14,962.02 599.14,954.82 ccw(c600.04,954.82) 600.04,953.92 628.24,953.92 cw(c628.24,953.02) 629.14,953.02 629.14,945.82 cw(c628.24,945.82) 628.24,944.92 600.04,944.92 ccw(c600.04,944.02) 599.14,944.02 599.14,936.82 ccw(c600.04,936.82) 600.04,935.92 628.24,935.92 cw(c628.24,935.02) 629.14,935.02 629.14,927.82 cw(c628.24,927.82) 628.24,926.92 600.04,926.92 ccw(c600.04,926.02) 599.14,926.02 599.14,918.82 ccw(c600.04,918.82) 600.04,917.92 613.24,917.92 cw(c613.24,917.02) 614.14,917.02 614.14,913.42 616.14,911.42 v1(643.7,911.42) ; v1@483.53,922.97 cw(c493.66,912.83) 493.66,927.17 cw(c493.66,941.5) v1@483.53,931.36 ; v1@639.5,907.22 ccw(c629.37,897.08) 629.37,911.42 ccw(c629.37,925.75) v1@639.5,915.62
ADDR4: U3.G2 U4.B3 | length 1252.6
  Top Layer w4: U4.B3@432.09,986.22 446.85,1000.98 498.03,1000.98 504.93,1007.89 504.93,1037.41 522.64,1055.12 593.88,1055.12 598.43,1050.57 598.43,1037.05 cw(c597.53,1037.05) 597.53,1036.15 574.33,1036.15 ccw(c574.33,1035.25) 573.43,1035.25 573.43,1028.05 ccw(c574.33,1028.05) 574.33,1027.15 619.63,1027.15 cw(c619.63,1026.25) 620.53,1026.25 620.53,1019.05 cw(c619.63,1019.05) 619.63,1018.15 574.33,1018.15 ccw(c574.33,1017.25) 573.43,1017.25 573.43,1010.05 ccw(c574.33,1010.05) 574.33,1009.15 622.53,1009.15 cw(c622.53,1008.25) 623.43,1008.25 623.43,1001.05 cw(c622.53,1001.05) 622.53,1000.15 574.33,1000.15 ccw(c574.33,999.25) 573.43,999.25 573.43,992.05 ccw(c574.33,992.05) 574.33,991.15 622.53,991.15 cw(c622.53,990.25) 623.43,990.25 623.43,983.05 cw(c622.53,983.05) 622.53,982.15 574.33,982.15 ccw(c574.33,981.25) 573.43,981.25 573.43,974.05 ccw(c574.33,974.05) 574.33,973.15 622.53,973.15 cw(c622.53,972.25) 623.43,972.25 623.43,965.05 cw(c622.53,965.05) 622.53,964.15 574.33,964.15 ccw(c574.33,963.25) 573.43,963.25 573.43,956.05 ccw(c574.33,956.05) 574.33,955.15 622.53,955.15 cw(c622.53,954.25) 623.43,954.25 623.43,947.05 cw(c622.53,947.05) 622.53,946.15 574.33,946.15 ccw(c574.33,945.25) 573.43,945.25 573.43,938.05 ccw(c574.33,938.05) 574.33,937.15 622.53,937.15 cw(c622.53,936.25) 623.43,936.25 623.43,929.05 cw(c622.53,929.05) 622.53,928.15 574.33,928.15 ccw(c574.33,927.25) 573.43,927.25 573.43,920.05 ccw(c574.33,920.05) 574.33,919.15 622.53,919.15 cw(c622.53,918.25) 623.43,918.25 623.43,911.05 cw(c622.53,911.05) 622.53,910.15 574.33,910.15 ccw(c574.33,909.25) 573.43,909.25 573.43,902.05 ccw(c574.33,902.05) 574.33,901.15 597.53,901.15 cw(c597.53,900.25) 598.43,900.25 598.43,896.65 599.41,895.67 641.73,895.67 ; U4.B3@432.09,989.93 ccw(c432.09,998.88) 438.42,992.55 ccw(c444.75,986.22) U4.B3@435.8,986.22 ; 641.42,895.98 641.73,895.67 ; U3.G2@696.88,911.42 cw(c680.32,911.42) 692.03,899.71 cw(c703.74,888) U3.G2@703.74,904.56 ; U3.G2@703.74,911.42 687.99,895.67 641.73,895.67
ADDR5: U3.F1 U4.B4 | length 1379.5
  Top Layer w4: U4.B4@432.09,952.98 cw(c432.09,944.03) 438.42,950.36 cw(c444.75,956.69) U4.B4@435.8,956.69 ; U4.B4@432.09,956.69 v1(446.85,941.93) ; v1@440.91,941.93 ccw(c426.58,941.93) 436.72,952.06 ccw(c446.85,962.2) v1@446.85,947.87 ; v1@644.69,941.8 671.13,941.8 U3.F1@672.24,942.91 ; v1@648.88,937.73 cw(c658.71,927.9) 658.71,941.8 ; v1@648.88,946.13 ccw(c659.32,956.57) 659.32,941.8 ; 653.01,941.8 ccw(c653.01,962.15) U3.F1@667.39,947.76 ; 658.37,941.8 cw(c658.37,929.04) U3.F1@667.39,938.06 ; 662.66,941.8 ccw(c662.66,952.49) U3.F1@670.22,944.93
  Bottom Layer w4: v1(446.85,941.93) 562.01,941.93 564.1,944.02 564.1,1214.57 567.06,1217.52 633.86,1217.52 637.8,1213.58 637.8,1199.8 637.8,1193.41 ccw(c638.7,1193.41) 638.7,1192.51 651.9,1192.51 cw(c651.9,1191.61) 652.8,1191.61 652.8,1184.41 cw(c651.9,1184.41) 651.9,1183.51 637.8,1183.51 623.7,1183.51 ccw(c623.7,1182.61) 622.8,1182.61 622.8,1175.41 ccw(c623.7,1175.41) 623.7,1174.51 637.8,1174.51 651.9,1174.51 cw(c651.9,1173.61) 652.8,1173.61 652.8,1166.41 cw(c651.9,1166.41) 651.9,1165.51 637.8,1165.51 623.7,1165.51 ccw(c623.7,1164.61) 622.8,1164.61 622.8,1157.41 ccw(c623.7,1157.41) 623.7,1156.51 637.8,1156.51 651.9,1156.51 cw(c651.9,1155.61) 652.8,1155.61 652.8,1148.41 cw(c651.9,1148.41) 651.9,1147.51 637.8,1147.51 623.7,1147.51 ccw(c623.7,1146.61) 622.8,1146.61 622.8,1139.41 ccw(c623.7,1139.41) 623.7,1138.51 637.8,1138.51 651.9,1138.51 cw(c651.9,1137.61) 652.8,1137.61 652.8,1130.41 cw(c651.9,1130.41) 651.9,1129.51 637.8,1129.51 623.7,1129.51 ccw(c623.7,1128.61) 622.8,1128.61 622.8,1121.41 ccw(c623.7,1121.41) 623.7,1120.51 637.8,1120.51 651.9,1120.51 cw(c651.9,1119.61) 652.8,1119.61 652.8,1112.41 cw(c651.9,1112.41) 651.9,1111.51 637.8,1111.51 623.7,1111.51 ccw(c623.7,1110.61) 622.8,1110.61 622.8,1103.41 ccw(c623.7,1103.41) 623.7,1102.51 637.8,1102.51 651.9,1102.51 cw(c651.9,1101.61) 652.8,1101.61 652.8,1094.41 cw(c651.9,1094.41) 651.9,1093.51 637.8,1093.51 623.7,1093.51 ccw(c623.7,1092.61) 622.8,1092.61 622.8,1085.41 ccw(c623.7,1085.41) 623.7,1084.51 637.8,1084.51 651.9,1084.51 cw(c651.9,1083.61) 652.8,1083.61 652.8,1076.41 cw(c651.9,1076.41) 651.9,1075.51 637.8,1075.51 623.7,1075.51 ccw(c623.7,1074.61) 622.8,1074.61 622.8,1067.41 ccw(c623.7,1067.41) 623.7,1066.51 636.9,1066.51 cw(c636.9,1065.61) 637.8,1065.61 637.8,1062.01 637.8,948.82 v1(644.69,941.93) ; v1@451.05,937.73 cw(c461.18,927.6) 461.18,941.93 cw(c461.18,956.26) v1@451.05,946.13 ; 637.8,953.58 ccw(c656.34,953.58) v1@643.23,940.47 ; 637.8,963.24 ccw(c665.99,963.24) v1@646.05,943.3 ; 637.8,972.9 ccw(c675.65,972.9) v1@648.88,946.13
ADDR6: U3.F2 U4.C3 | length 1383.1
  Top Layer w4: U4.C3@402.56,986.22 v1(417.32,1000.99) ; U4.C3@402.56,989.93 ccw(c402.56,998.86) 408.88,992.55 ccw(c415.24,986.22) U4.C3@406.27,986.22 ; v1@411.39,1000.99 cw(c397.06,1000.99) 407.19,990.86 cw(c417.32,980.73) v1@417.32,995.06 ; U3.F2@703.74,942.91 v1(719.49,958.67) ; U3.F2@703.74,949.77 ccw(c703.74,966.32) v1@715.44,954.62 ; U3.F2@707.28,949.91 ccw(c700.86,961.03) v1@713.6,959.41 ; U3.F2@710.6,942.91 cw(c727.17,942.91) v1@715.45,954.63 ; U3.F2@710.74,946.46 cw(c721.85,940.05) v1@720.23,952.78 ; 710.92,952.01 cw(c715.55,943.99) v1@717.95,952.93 ; 712.83,950.09 ccw(c704.79,954.73) v1@713.76,957.13 ; v1@713.55,958.67 cw(c699.23,958.67) 709.36,948.54 cw(c719.49,938.41) v1@719.49,952.73
  Bottom Layer w4: v1(417.32,1000.99) 532.48,1000.99 536.42,1004.92 536.42,1297.24 541.34,1302.17 622.05,1302.17 625.65,1302.17 ccw(c625.65,1303.07) 626.55,1303.07 626.55,1316.27 cw(c627.45,1316.27) 627.45,1317.17 634.65,1317.17 cw(c634.65,1316.27) 635.55,1316.27 635.55,1302.17 635.55,1288.07 ccw(c636.45,1288.07) 636.45,1287.17 643.65,1287.17 ccw(c643.65,1288.07) 644.55,1288.07 644.55,1302.17 644.55,1316.27 cw(c645.45,1316.27) 645.45,1317.17 652.65,1317.17 cw(c652.65,1316.27) 653.55,1316.27 653.55,1302.17 653.55,1288.07 ccw(c654.45,1288.07) 654.45,1287.17 661.65,1287.17 ccw(c661.65,1288.07) 662.55,1288.07 662.55,1302.17 662.55,1316.27 cw(c663.45,1316.27) 663.45,1317.17 670.65,1317.17 cw(c670.65,1316.27) 671.55,1316.27 671.55,1302.17 671.55,1288.07 ccw(c672.45,1288.07) 672.45,1287.17 679.65,1287.17 ccw(c679.65,1288.07) 680.55,1288.07 680.55,1302.17 680.55,1316.27 cw(c681.45,1316.27) 681.45,1317.17 688.65,1317.17 cw(c688.65,1316.27) 689.55,1316.27 689.55,1302.17 689.55,1288.07 ccw(c690.45,1288.07) 690.45,1287.17 697.65,1287.17 ccw(c697.65,1288.07) 698.55,1288.07 698.55,1302.17 698.82,1302.17 713.58,1302.17 719.49,1296.26 v1(719.49,958.67) ; v1@421.51,996.79 cw(c431.64,986.66) 431.64,1000.99 cw(c431.64,1015.31) v1@421.51,1005.18 ; v1@715.29,962.86 ccw(c705.16,972.99) 719.49,972.99 ccw(c733.81,972.99) v1@723.68,962.86
ADDR7: U3.E1 U4.C4 | length 1361.3
  Top Layer w4: U4.C4@402.56,956.69 v1(417.32,971.46) ; U4.C4@402.56,960.4 ccw(c402.56,969.34) 408.88,963.02 ; U4.C4@406.27,956.69 cw(c415.24,956.69) 408.9,963.04 ; v1@411.39,971.46 cw(c397.06,971.46) 407.19,961.33 cw(c417.32,951.2) v1@417.32,965.53 ; U3.E1@672.24,974.41 v1(687.99,990.16) ; U3.E1@672.24,981.27 ccw(c672.24,997.82) 683.95,986.12 ccw(c695.66,974.41) U3.E1@679.1,974.41 ; U3.E1@675.79,981.41 ccw(c669.37,992.52) v1@682.11,990.9 ; U3.E1@679.24,977.96 cw(c690.36,971.54) v1@688.74,984.27 ; 679.42,983.5 cw(c684.06,975.47) v1@686.46,984.43 ; 681.33,981.58 ccw(c673.3,986.22) v1@682.26,988.62 ; v1@682.06,990.16 cw(c667.74,990.16) 677.86,980.03 cw(c687.99,969.9) v1@687.99,984.22
  Bottom Layer w4: v1(417.32,971.46) 432.08,986.22 542.32,986.22 545.28,989.17 545.28,1263.78 550.2,1268.7 681.1,1268.7 687.99,1261.81 687.99,1251.97 687.99,1248.37 ccw(c688.89,1248.37) 688.89,1247.47 702.09,1247.47 cw(c702.09,1246.57) 702.99,1246.57 702.99,1239.37 cw(c702.09,1239.37) 702.09,1238.47 687.99,1238.47 673.89,1238.47 ccw(c673.89,1237.57) 672.99,1237.57 672.99,1230.37 ccw(c673.89,1230.37) 673.89,1229.47 687.99,1229.47 702.09,1229.47 cw(c702.09,1228.57) 702.99,1228.57 702.99,1221.37 cw(c702.09,1221.37) 702.09,1220.47 687.99,1220.47 673.89,1220.47 ccw(c673.89,1219.57) 672.99,1219.57 672.99,1212.37 ccw(c673.89,1212.37) 673.89,1211.47 687.99,1211.47 702.09,1211.47 cw(c702.09,1210.57) 702.99,1210.57 702.99,1203.37 cw(c702.09,1203.37) 702.09,1202.47 687.99,1202.47 673.89,1202.47 ccw(c673.89,1201.57) 672.99,1201.57 672.99,1194.37 ccw(c673.89,1194.37) 673.89,1193.47 687.99,1193.47 702.09,1193.47 cw(c702.09,1192.57) 702.99,1192.57 702.99,1185.37 cw(c702.09,1185.37) 702.09,1184.47 687.99,1184.47 673.89,1184.47 ccw(c673.89,1183.57) 672.99,1183.57 672.99,1176.37 ccw(c673.89,1176.37) 673.89,1175.47 687.99,1175.47 702.09,1175.47 cw(c702.09,1174.57) 702.99,1174.57 702.99,1167.37 cw(c702.09,1167.37) 702.09,1166.47 687.99,1166.47 673.89,1166.47 ccw(c673.89,1165.57) 672.99,1165.57 672.99,1158.37 ccw(c673.89,1158.37) 673.89,1157.47 687.99,1157.47 702.09,1157.47 cw(c702.09,1156.57) 702.99,1156.57 702.99,1149.37 cw(c702.09,1149.37) 702.09,1148.47 688.89,1148.47 ccw(c688.89,1147.57) 687.99,1147.57 687.99,1142.72 v1(687.99,990.16) ; v1@417.32,977.39 ccw(c417.32,991.72) 427.45,981.59 ccw(c437.58,971.46) v1@423.25,971.46 ; v1@683.8,994.35 ccw(c673.67,1004.48) 687.99,1004.48 ccw(c702.32,1004.48) v1@692.19,994.35
ADDR8: U3.E2 U4.D4 | length 1356.9
  Top Layer w4: U4.D4@373.03,952.98 cw(c373.03,944.03) 379.36,950.36 cw(c385.69,956.69) U4.D4@376.74,956.69 ; U4.D4@373.03,956.69 v1(387.8,941.93) ; v1@381.86,941.93 ccw(c367.53,941.93) 377.66,952.06 ccw(c387.8,962.2) v1@387.8,947.87 ; v1@687.25,964.55 ccw(c685.64,977.28) U3.E2@696.74,970.86 ; v1(687.99,958.66) U3.E2@703.74,974.41 ; v1@687.99,964.6 ccw(c687.99,978.93) 698.13,968.8 ccw(c708.26,958.66) v1@693.93,958.66 ; v1@689.53,964.4 ccw(c691.93,973.36) 696.57,965.32 ; v1@693.73,960.2 cw(c702.69,962.6) 694.65,967.24 ; v1@693.88,957.92 cw(c706.61,956.31) U3.E2@700.19,967.41 ; U3.E2@696.88,974.41 cw(c680.32,974.41) 692.03,962.7 cw(c703.74,950.99) U3.E2@703.74,967.55
  Bottom Layer w4: v1(387.8,941.93) 413.39,941.93 444.88,973.43 550.2,973.43 556.1,979.33 556.1,1231.3 559.06,1234.25 659.45,1234.25 664.26,1229.44 664.26,1070.87 664.26,1065.14 cw(c663.36,1065.14) 663.36,1064.24 650.16,1064.24 ccw(c650.16,1063.34) 649.26,1063.34 649.26,1056.14 ccw(c650.16,1056.14) 650.16,1055.24 664.26,1055.24 678.36,1055.24 cw(c678.36,1054.34) 679.26,1054.34 679.26,1047.14 cw(c678.36,1047.14) 678.36,1046.24 664.26,1046.24 650.16,1046.24 ccw(c650.16,1045.34) 649.26,1045.34 649.26,1038.14 ccw(c650.16,1038.14) 650.16,1037.24 664.26,1037.24 678.36,1037.24 cw(c678.36,1036.34) 679.26,1036.34 679.26,1029.14 cw(c678.36,1029.14) 678.36,1028.24 664.26,1028.24 650.16,1028.24 ccw(c650.16,1027.34) 649.26,1027.34 649.26,1020.14 ccw(c650.16,1020.14) 650.16,1019.24 664.26,1019.24 678.36,1019.24 cw(c678.36,1018.34) 679.26,1018.34 679.26,1011.14 cw(c678.36,1011.14) 678.36,1010.24 664.26,1010.24 650.16,1010.24 ccw(c650.16,1009.34) 649.26,1009.34 649.26,1002.14 ccw(c650.16,1002.14) 650.16,1001.24 664.26,1001.24 673.46,1001.24 cw(c673.46,1000.34) 674.36,1000.34 674.36,993.14 cw(c673.46,993.14) 673.46,992.24 664.26,992.24 650.16,992.24 ccw(c650.16,991.34) 649.26,991.34 649.26,984.14 ccw(c650.16,984.14) 650.16,983.24 664.26,983.24 675.39,983.24 cw(c675.39,982.34) 676.29,982.34 676.29,975.14 cw(c675.39,975.14) 675.39,974.24 664.26,974.24 650.16,974.24 ccw(c650.16,973.34) 649.26,973.34 649.26,966.14 ccw(c650.16,966.14) 650.16,965.24 663.36,965.24 cw(c663.36,964.34) 664.26,964.34 664.26,960.74 666.34,958.66 v1(687.99,958.66) ; v1@391.99,937.73 cw(c402.13,927.6) 402.13,941.93 cw(c402.13,956.26) v1@391.99,946.13 ; v1@683.79,954.46 ccw(c673.66,944.33) 673.66,958.66 ccw(c673.66,972.99) v1@683.79,962.86
ADDR9: U3.D1 U4.H2 | length 1235.6
  Top Layer w4: U4.H2@252.3,1013.13 ccw(c245.97,1006.79) 245.97,1015.75 ccw(c245.97,1024.7) U4.H2@252.3,1018.37 ; U4.H2@254.92,1015.75 233.27,1015.75 232.28,1016.73 232.28,1020.33 ccw(c231.38,1020.33) 231.38,1021.23 223.18,1021.23 cw(c223.18,1022.13) 222.28,1022.13 222.28,1029.33 cw(c223.18,1029.33) 223.18,1030.23 241.38,1030.23 ccw(c241.38,1031.13) 242.28,1031.13 242.28,1038.33 ccw(c241.38,1038.33) 241.38,1039.23 223.18,1039.23 cw(c223.18,1040.13) 222.28,1040.13 222.28,1047.33 cw(c223.18,1047.33) 223.18,1048.23 241.38,1048.23 ccw(c241.38,1049.13) 242.28,1049.13 242.28,1056.33 ccw(c241.38,1056.33) 241.38,1057.23 223.18,1057.23 cw(c223.18,1058.13) 222.28,1058.13 222.28,1065.33 cw(c223.18,1065.33) 223.18,1066.23 240.25,1066.23 ccw(c240.25,1067.13) 241.15,1067.13 241.15,1074.33 ccw(c240.25,1074.33) 240.25,1075.23 223.18,1075.23 cw(c223.18,1076.13) 222.28,1076.13 222.28,1083.33 cw(c223.18,1083.33) 223.18,1084.23 241.38,1084.23 ccw(c241.38,1085.13) 242.28,1085.13 242.28,1092.33 ccw(c241.38,1092.33) 241.38,1093.23 233.18,1093.23 cw(c233.18,1094.13) 232.28,1094.13 232.28,1097.44 233.42,1098.58 507,1098.58 512.02,1098.58 cw(c512.02,1097.68) 512.92,1097.68 512.92,1063.87 ccw(c513.82,1063.87) 513.82,1062.97 521.02,1062.97 ccw(c521.02,1063.87) 521.92,1063.87 521.92,1097.68 cw(c522.82,1097.68) 522.82,1098.58 530.02,1098.58 cw(c530.02,1097.68) 530.92,1097.68 530.92,1064.02 ccw(c531.82,1064.02) 531.82,1063.12 539.02,1063.12 ccw(c539.02,1064.02) 539.92,1064.02 539.92,1097.68 cw(c540.82,1097.68) 540.82,1098.58 548.02,1098.58 cw(c548.02,1097.68) 548.92,1097.68 548.92,1064.02 ccw(c549.82,1064.02) 549.82,1063.12 557.02,1063.12 ccw(c557.02,1064.02) 557.92,1064.02 557.92,1097.68 cw(c558.82,1097.68) 558.82,1098.58 566.02,1098.58 cw(c566.02,1097.68) 566.92,1097.68 566.92,1064.02 ccw(c567.82,1064.02) 567.82,1063.12 575.02,1063.12 ccw(c575.02,1064.02) 575.92,1064.02 575.92,1097.68 cw(c576.82,1097.68) 576.82,1098.58 584.02,1098.58 cw(c584.02,1097.68) 584.92,1097.68 584.92,1064.02 ccw(c585.82,1064.02) 585.82,1063.12 593.02,1063.12 ccw(c593.02,1064.02) 593.92,1064.02 593.92,1097.68 cw(c594.82,1097.68) 594.82,1098.58 602.02,1098.58 cw(c602.02,1097.68) 602.92,1097.68 602.92,1057.76 ccw(c603.82,1057.76) 603.82,1056.86 611.02,1056.86 ccw(c611.02,1057.76) 611.92,1057.76 611.92,1097.68 cw(c612.82,1097.68) 612.82,1098.58 616.42,1098.58 617.39,1097.61 617.39,1041.08 652.56,1005.91 U3.D1@672.24,1005.91 ; U3.D1@667.39,1001.06 ccw(c655.69,989.35) 655.69,1005.91 ccw(c655.69,1022.46) U3.D1@667.39,1010.75
ADDR10: U3.D2 U4.H3 | length 1229.8
  Top Layer w4: U4.H3@252.3,983.6 ccw(c245.97,977.27) 245.97,986.22 ccw(c245.97,995.17) U4.H3@252.3,988.84 ; U4.H3@254.92,986.22 196.78,986.22 194.79,988.21 194.79,992.6 cw(c195.69,992.6) 195.69,993.5 213.89,993.5 ccw(c213.89,994.4) 214.79,994.4 214.79,1001.6 ccw(c213.89,1001.6) 213.89,1002.5 175.69,1002.5 cw(c175.69,1003.4) 174.79,1003.4 174.79,1010.6 cw(c175.69,1010.6) 175.69,1011.5 213.72,1011.5 ccw(c213.72,1012.4) 214.62,1012.4 214.62,1019.6 ccw(c213.72,1019.6) 213.72,1020.5 175.69,1020.5 cw(c175.69,1021.4) 174.79,1021.4 174.79,1028.6 cw(c175.69,1028.6) 175.69,1029.5 213.44,1029.5 ccw(c213.44,1030.4) 214.34,1030.4 214.34,1037.6 ccw(c213.44,1037.6) 213.44,1038.5 175.69,1038.5 cw(c175.69,1039.4) 174.79,1039.4 174.79,1046.6 cw(c175.69,1046.6) 175.69,1047.5 213.44,1047.5 ccw(c213.44,1048.4) 214.34,1048.4 214.34,1055.6 ccw(c213.44,1055.6) 213.44,1056.5 175.69,1056.5 cw(c175.69,1057.4) 174.79,1057.4 174.79,1064.6 cw(c175.69,1064.6) 175.69,1065.5 213.44,1065.5 ccw(c213.44,1066.4) 214.34,1066.4 214.34,1073.6 ccw(c213.44,1073.6) 213.44,1074.5 175.69,1074.5 cw(c175.69,1075.4) 174.79,1075.4 174.79,1082.6 cw(c175.69,1082.6) 175.69,1083.5 213.44,1083.5 ccw(c213.44,1084.4) 214.34,1084.4 214.34,1091.6 ccw(c213.44,1091.6) 213.44,1092.5 195.69,1092.5 cw(c195.69,1093.4) 194.79,1093.4 194.79,1106.79 196.13,1108.13 620.87,1108.13 625.39,1103.61 625.39,1049.81 653.54,1021.65 687.99,1021.65 U3.D2@703.74,1005.91 ; U3.D2@696.88,1005.91 ccw(c680.32,1005.91) 692.03,1017.61 ccw(c703.74,1029.32) U3.D2@703.74,1012.76